# Altium PCB Keyboard_i2c.PcbDoc
Units mm, origin at the board's own origin, x right, y up, seen from the top; angles counter-clockwise.
Board outline 152.4 x 101.6 mm, 2 copper layers (Top Layer, Bottom Layer); 36 components, 34 nets, 98 pads, 0 vias.
Unrouted connection lines stored in the file: 62.
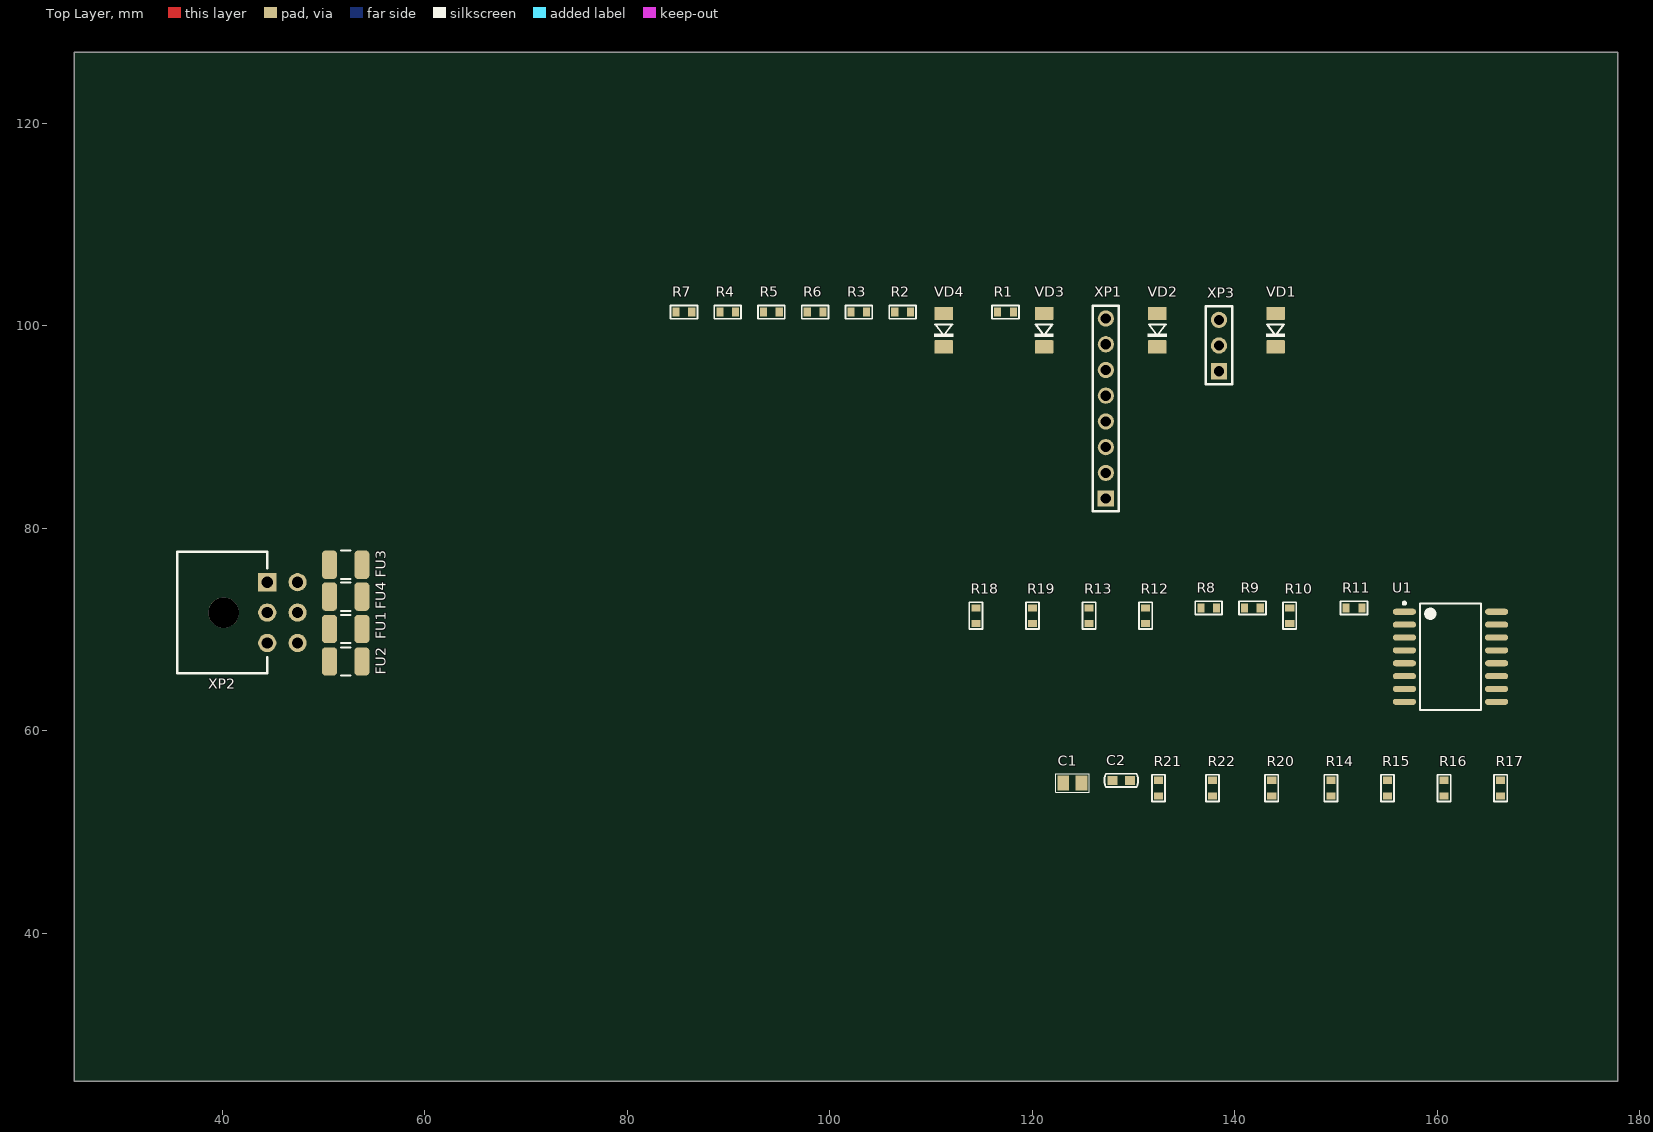
[diagram p0: Top Layer view]
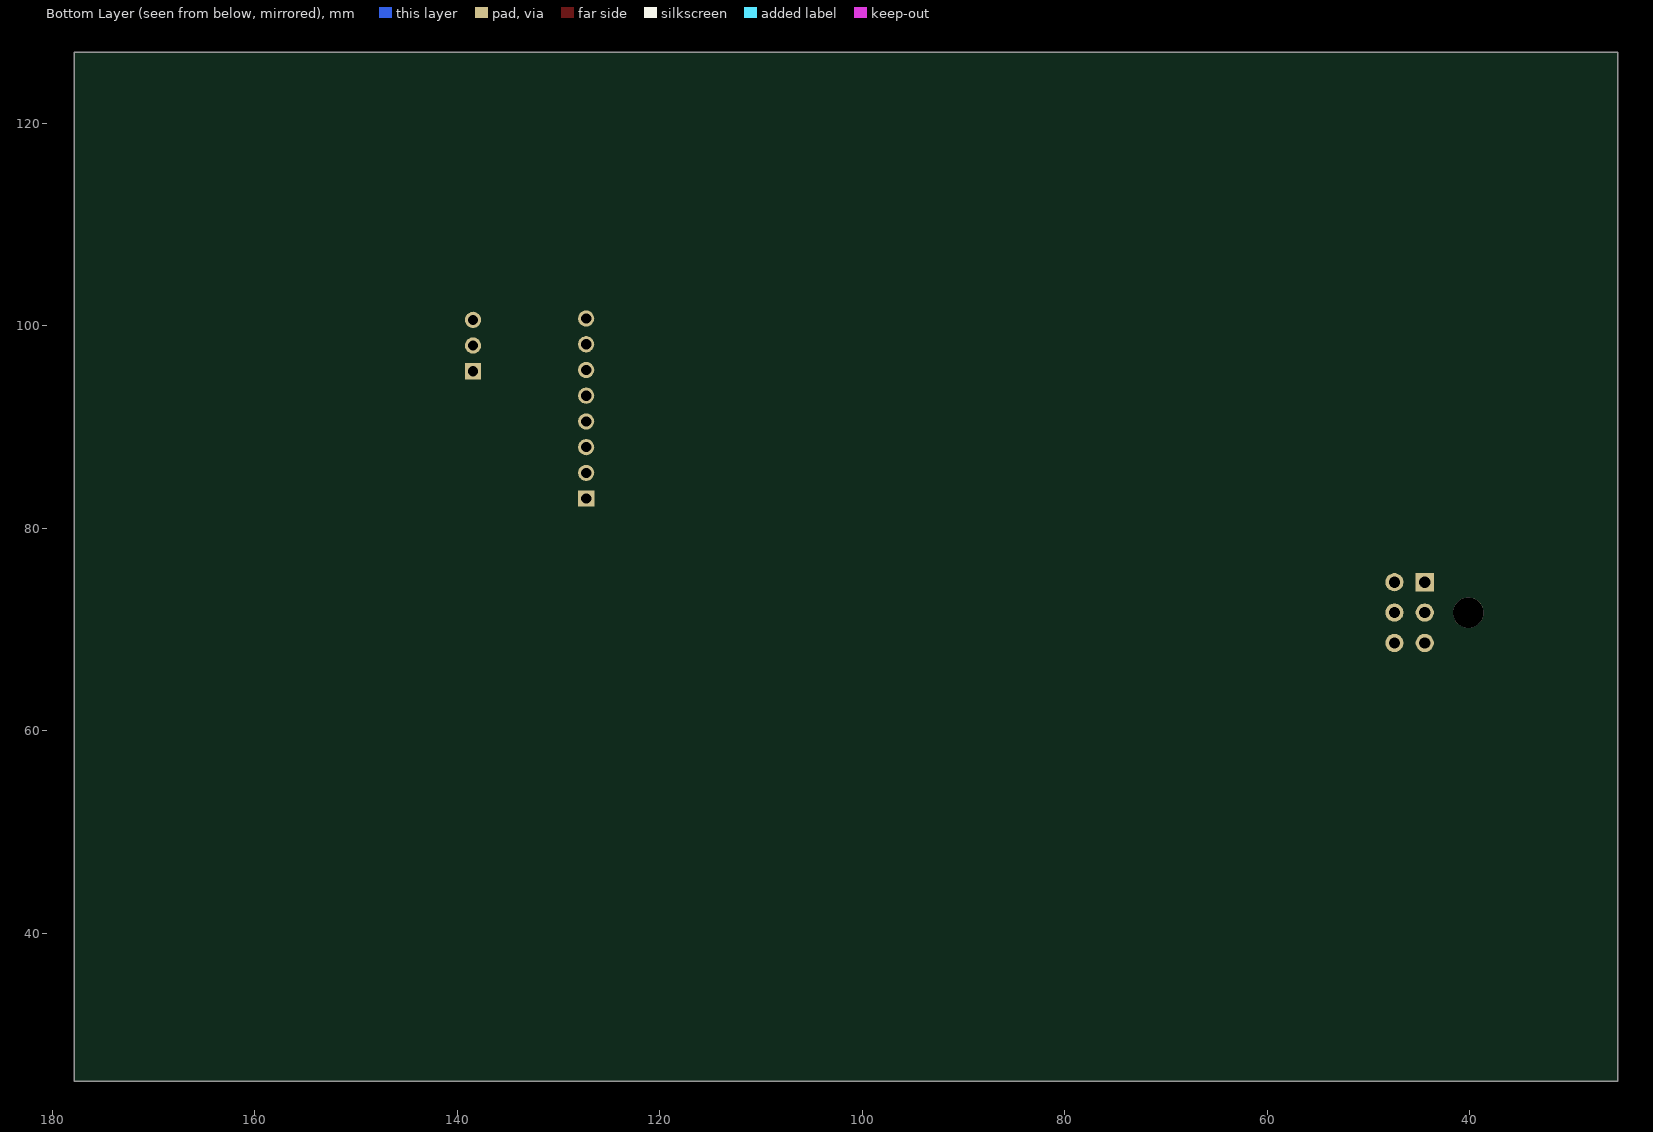
[diagram p1: Bottom Layer view, seen from below]

## Layer stack, top to bottom
Top Solder: solder mask 0.0102, Solder Resist, Dk 3.5
Top Layer: signal copper 0.0356
Dielectric 1: dielectric 0.32, FR-4, Dk 4.8
Bottom Layer: signal copper 0.0356
Bottom Solder: solder mask 0.0102, Solder Resist, Dk 3.5

## Board outline
25.4,25.4 177.8,25.4 177.8,127 25.4,127

## Design rules (kind name [scope] priority, off if disabled: settings)
Clearance [All] p1: gap=0.3
PolygonConnect PolygonConnect_1 [IsVia] p1: connectstyle=Direct reliefconductorwidth=0.254 reliefentries=4 polygonreliefangle="90 Angle" airgapwidth=0.254
PolygonConnect [All] p2: connectstyle=Relief reliefconductorwidth=0.3 reliefentries=4 polygonreliefangle="90 Angle" airgapwidth=0.3
RoutingVias [All] p1: holewidth=0.4 width=0.8 viastyle="Through Hole" minholewidth=0.3 minwidth=0.6 maxholewidth=0.5 maxwidth=1
SolderMaskExpansion [All] p1: expansion=0.102
Width [All] p1: maxlimit=3 minlimit=0.2 preferedwidth=0.5
30 further rules are at their usual default settings.

## Components (designator, comment, footprint, x,y, rotation, side; value= is the part's Value field where it differs from the comment)
C1 "10uFx10V" CC0805 123.952,54.852 r0 top
C2 "0.1uF" CC0603 128.778,55.106 r0 top
FU1 "MICROSMD010F-2" RC1210 52.2,70.054 r0 top
FU2 "MICROSMD010F-2" RC1210 52.2,66.85 r0 top
FU3 "MICROSMD010F-2" RC1210 52.2,76.4 r0 top
FU4 "MICROSMD010F-2" RC1210 52.2,73.25 r0 top
R1 "4k7" RC0603 117.348,101.346 r0 top
R2 "4k7" RC0603 107.188,101.346 r0 top
R3 "4k7" RC0603 102.87,101.346 r0 top
R4 "2k2" RC0603 89.916,101.346 r0 top
R5 "2k2" RC0603 94.234,101.346 r0 top
R6 "10k" RC0603 98.552,101.346 r0 top
R7 "4k7" RC0603 85.598,101.346 r0 top
R8 "10k" RC0603 137.414,72.136 r0 top
R9 "10k" RC0603 141.732,72.136 r0 top
R10 "10k" RC0603 145.415,71.374 r90 top
R11 "10k" RC0603 151.765,72.136 r0 top
R12 "4k7" RC0603 131.191,71.374 r90 top
R13 "4k7" RC0603 125.603,71.374 r90 top
R14 "4k7" RC0603 149.479,54.344 r90 top
R15 "n.p" RC0603 155.067,54.344 r90 top
R16 "n.p" RC0603 160.655,54.344 r90 top
R17 "0E" RC0603 166.243,54.344 r90 top
R18 "0E" RC0603 114.427,71.374 r90 top
R19 "n.p" RC0603 120.015,71.374 r90 top
R20 "4k7" RC0603 143.637,54.344 r90 top
R21 "10k" RC0603 132.461,54.344 r90 top
R22 "4k7" RC0603 137.795,54.344 r90 top
U1 "PCF8574ADWR" DW16_N 161.29,67.31 r0 top
VD1 "LL4148" SOD-80 144.018,99.568 r90 top
VD2 "LL4148" SOD-80 132.334,99.568 r90 top
VD3 "LL4148" SOD-80 121.158,99.568 r90 top
VD4 "LL4148" SOD-80 111.252,99.568 r90 top
XP1 "PLS-08" PLS-08 127.254,82.931 r90 top
XP2 "MIF2X03PRP" MIF2X03PRP 44.45,74.676 r180 top
XP3 "PLS03" PLS-03 138.43,95.504 r90 top

## Footprints (in the part's own frame and the unit in brackets; to place one, negate y for a bottom-side part, rotate by r counter-clockwise, add the part's x,y. Pads: shape width x height; smd on the part's side, far side on the other; paste and mask are expansions set on the pad)
CC0603 [mm]
  rect 1x0.9 smd paste-25.4: 1(-0.85,0) 2(0.85,0)
  silkscreen extent -1.66,-0.65 1.66,0.65
CC0805 [mm]
  rect 1.15x1.45 smd paste-25.4: 1(-0.9,0) 2(0.9,0)
  silkscreen extent -1.65,-0.9 1.65,0.9
DW16_N [mm] "SOIC, 16-Leads, Body 10.3x7.5mm, Pitch 1.27mm, IPC Medium Density"
  oval 2.3x0.6 smd: 1(-4.55,4.445) 2(-4.55,3.175) 3(-4.55,1.905) 4(-4.55,0.635) 5(-4.55,-0.635) 6(-4.55,-1.905) 7(-4.55,-3.175) 8(-4.55,-4.445) 9(4.55,-4.445) 10(4.55,-3.175) 11(4.55,-1.905) 12(4.55,-0.635) 13(4.55,0.635) 14(4.55,1.905) 15(4.55,3.175) 16(4.55,4.445)
  silkscreen extent -4.67,-5.25 3,5.42, body extent -3.79,-5.25 3.8,5.25, height 2.64
MIF2X03PRP [mm]
  rect 1.8x1.8 hole 1.1: 1(0,0)
  round 1.8 hole 1.1: 2(0,3) 3(0,6) 4(-3,0) 5(-3,3) 6(-3,6)
  round 3 hole 3 unplated: 7(4.3,3)
  silkscreen extent 0,-3 8.9,9
PLS-03 [mm]
  rect 1.6x1.6 hole 1: 1(0,0)
  round 1.6 hole 1: 2(2.54,0) 3(5.08,0)
  silkscreen extent -1.3,-1.3 6.4,1.3
PLS-08 [mm]
  rect 1.6x1.6 hole 1: 1(0,0)
  round 1.6 hole 1: 2(2.54,0) 3(5.08,0) 4(7.62,0) 5(10.16,0) 6(12.7,0) 7(15.24,0) 8(17.78,0)
  silkscreen extent -1.27,-1.27 19.05,1.27
RC0603 [mm]
  rect 0.7x0.9 smd paste-25.4: 1(-0.775,0) 2(0.774,0)
  silkscreen extent -1.32,-0.65 1.33,0.65
RC1210 [mm]
  rrect50% 1.5x2.8 smd: 1(-1.6,0) 2(1.6,0)
  silkscreen extent -0.45,-1.4 0.45,1.4
SOD-80 [mm]
  rrect10% 1.3x1.83 smd paste-25.4: 1(1.651,0) 2(-1.651,0)
  silkscreen extent -0.66,-0.91 0.56,0.91

## Part data
C1: library part CC0805, "CC0805"
C2: library part CC0603, "CC0603"
FU1 FU2 FU3 FU4: library part MICROSMD, "MICROSMD"
R1 R2 R3 R4 R5 R6 R7 R8 R9 R10 R11 R12 R13 R14 R15 R16 R17 R18 R19 R20 R21 R22: library part RC0603, "RC0603"
U1: "Remote 8-Bit I/O Expander for I2C-Bus, 2.5 to 6.0 V, -40 to 85 degC, 16-pin SOIC (DW), Green (RoHS & no Sb/Br)"

## Nets (pads, with @x,y where several pads share a name; then routed paths per layer and width w, separated by ;. In a path a pad name is that pad's centre, name@x,y a point inside that pad or via, vN(x,y) a via of type N, cw(c..) or ccw(c..) an arc to the next point about the centre after c; other vN are vias at no path point)
+5V: C1.2 C2.2 FU2.2 R4.2 R5.2 R6.2 R8.1 R9.1 R10.1 R11.1 R21.1 U1.16
COL1: R1.1 U1.4
COL2: R2.1 U1.5
COL3: R3.1 U1.6
COL4: R7.1 U1.7
GND: C1.1 C2.1 R17.2 R18.2 R19.2 U1.8 XP2.1 XP3.1
NetFU1_1: FU1.1 XP2.2
NetFU1_2: FU1.2 R5.1 U1.14
NetFU2_1: FU2.1 XP2.3
NetFU3_1: FU3.1 XP2.4
NetFU3_2: FU3.2 R4.1 U1.15
NetFU4_1: FU4.1 XP2.5
NetFU4_2: FU4.2 R6.1 U1.13
NetR1_2: R1.2 VD1.2
NetR2_2: R2.2 VD2.2
NetR3_2: R3.2 VD3.2
NetR7_2: R7.2 VD4.2
NetR8_2: R8.2 R22.2 XP1.8
NetR9_2: R9.2 R20.2 XP1.7
NetR10_2: R10.2 R13.2 XP1.6
NetR11_2: R11.2 R12.2 XP1.5
NetR14_1: R14.1 R19.1 U1.3
NetR14_2: R14.2 R15.2 R16.2 R21.2
NetR15_1: R15.1 R18.1 U1.2
NetR16_1: R16.1 R17.1 U1.1
NetVD1_1: VD1.1 XP1.1
NetVD2_1: VD2.1 XP1.2
NetVD3_1: VD3.1 XP1.3
NetVD4_1: VD4.1 XP1.4
NetXP2_6: XP2.6 XP3.2
ROW1: R12.1 U1.9
ROW2: R13.1 U1.10
ROW3: R20.1 U1.11
ROW4: R22.1 U1.12
pads on no net: XP2.7 XP3.3